# Altium PCB AP2-Core.PcbDoc (part 3 of 3)
Units mm, origin at the board's own origin, x right, y up, seen from the top; angles counter-clockwise.
Board outline 50.2 x 44.2 mm, 4 copper layers (顶层, MidLayer1, MidLayer2, 底层); 65 components, 157 nets, 448 pads, 134 vias.
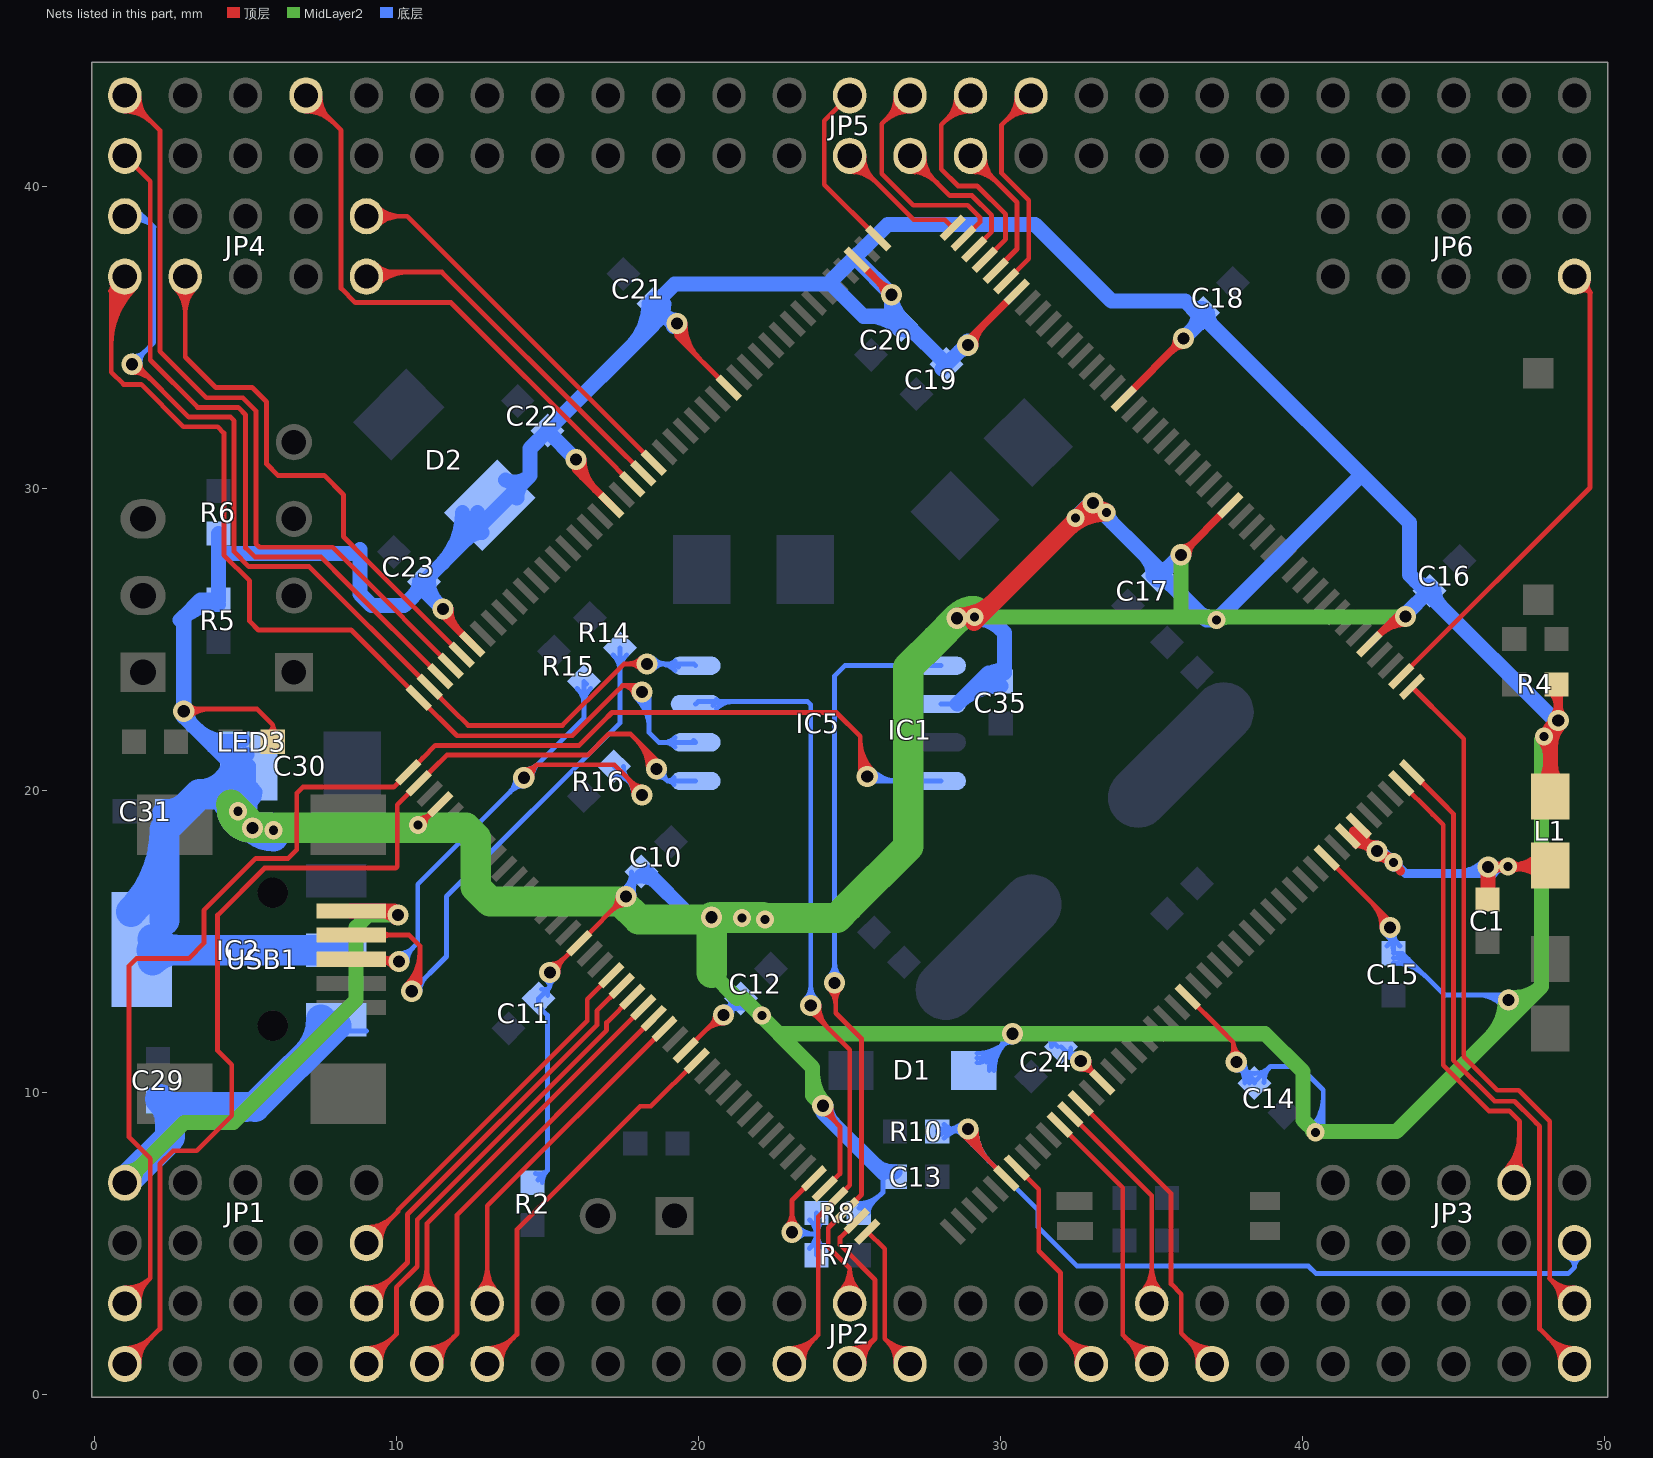
[diagram p5: the nets of this part, all layers, seen from the top]

## Via types
v1: diameter 0.7, hole 0.4, 顶层 to 底层, 90 vias
v2: diameter 0.6, hole 0.3, 顶层 to 底层, 44 vias

## Nets (pads, with @x,y where several pads share a name; then routed paths per layer and width w, separated by ;. In a path a pad name is that pad's centre, name@x,y a point inside that pad or via, vN(x,y) a via of type N, cw(c..) or ccw(c..) an arc to the next point about the centre after c; other vN are vias at no path point) (continued)
PG6: IC1.110 JP4.9 | length 15.9
  顶层 w0.16: JP4.9@9,39 10.354,39 IC1.110@18.515,30.839 ; JP4.9@9.219,38.781 cw(c9.748,38.252) 9.748,39 cw(c9.748,39.748) JP4.9@9.219,39.219 ; JP4.9@9.332,38.668 cw(c10.135,37.865) 10.135,39 cw(c10.135,40.135) JP4.9@9.332,39.332
PG7: IC1.111 JP4.10 | length 15.2
  顶层 w0.16: JP4.10@9,37 9.15,37.15 11.496,37.15 17.113,31.533 IC1.111@18.161,30.485 ; JP4.10@9.106,36.944 cw(c9.604,36.446) 9.604,37.15 ; JP4.10@9.219,36.831 cw(c9.99,36.06) 9.99,37.15 ; JP4.10@9.332,36.718 cw(c10.376,35.674) 10.376,37.15 ; JP4.10@9.332,37.382 ccw(c9.893,37.943) 9.893,37.15
PG8: IC1.112 JP5.7 | length 22.2
  顶层 w0.16: JP5.7@7,42.48 cw(c7,41.225) 7.888,42.112 ; JP5.7@7,42.64 cw(c7,41.771) 7.615,42.385 ; JP5.7@7,43 8.16,41.84 8.16,36.61 8.63,36.14 11.799,36.14 16.793,31.146 IC1.112@17.808,30.132 ; JP5.7@7.31,42.95 ccw(c7.938,42.95) 7.494,42.506 ; JP5.7@7.47,42.95 ccw(c8.484,42.95) 7.767,42.233
PG9: IC1.152 JP1.10 | length 15.2
  顶层 w0.16: JP1.10@9,5 10.04,6.04 10.04,6.09 16.31,12.36 16.31,13.077 IC1.152@17.101,13.868 ; JP1.10@9,5.36 ccw(c9,6.229) 9.615,5.615 ; JP1.10@9,5.52 ccw(c9,6.775) 9.888,5.888 ; JP1.10@9.31,5.05 cw(c9.938,5.05) 9.494,5.494 ; JP1.10@9.47,5.05 cw(c10.484,5.05) 9.767,5.767
PG10: IC1.153 JP2.9 | length 17
  顶层 w0.16: JP2.9@9,3 10.36,4.36 10.36,5.95 16.63,12.22 16.63,12.69 IC1.153@17.454,13.515 ; JP2.9@9,3.36 ccw(c9,4.229) 9.615,3.615 ; JP2.9@9,3.52 ccw(c9,4.775) 9.888,3.888 ; JP2.9@9.31,3.05 cw(c9.938,3.05) 9.494,3.494 ; JP2.9@9.47,3.05 cw(c10.484,3.05) 9.767,3.767
PG11: IC1.154 JP2.10 | length 18.8
  顶层 w0.16: JP2.10@9,1 9.99,1.99 9.99,3.537 10.68,4.227 10.68,5.78 16.95,12.05 16.95,12.303 IC1.154@17.808,13.161 ; JP2.10@9,1.36 ccw(c9,2.229) 9.615,1.615 ; JP2.10@9,1.52 ccw(c9,2.775) 9.888,1.888 ; JP2.10@9.31,1.05 cw(c9.938,1.05) 9.494,1.494 ; JP2.10@9.47,1.05 cw(c10.484,1.05) 9.767,1.767
PG12: IC1.155 JP2.11 | length 15.7
  顶层 w0.16: JP2.11@10.668,3.382 ccw(c9.865,4.185) 11,4.185 ccw(c12.135,4.185) JP2.11@11.332,3.382 ; JP2.11@10.781,3.269 ccw(c10.252,3.798) 11,3.798 ccw(c11.748,3.798) JP2.11@11.219,3.269 ; JP2.11@11,3 11,5.646 IC1.155@18.161,12.808
PG13: IC1.156 JP2.12 | length 17.5
  顶层 w0.16: JP2.12@11,1 12,2 12,5.939 IC1.156@18.515,12.454 ; JP2.12@11,1.36 ccw(c11,2.229) 11.615,1.615 ; JP2.12@11,1.52 ccw(c11,2.775) 11.888,1.888 ; JP2.12@11.31,1.05 cw(c11.938,1.05) 11.494,1.494 ; JP2.12@11.47,1.05 cw(c12.484,1.05) 11.767,1.767
PG14: IC1.157 JP2.13 | length 14.5
  顶层 w0.16: JP2.13@12.668,3.382 ccw(c11.865,4.185) 13,4.185 ccw(c14.135,4.185) JP2.13@13.332,3.382 ; JP2.13@12.781,3.269 ccw(c12.252,3.798) 13,3.798 ccw(c13.748,3.798) JP2.13@13.219,3.269 ; JP2.13@13,3 13,6.232 IC1.157@18.868,12.1
PG15: IC1.160 JP2.14 | length 16.1
  顶层 w0.16: JP2.14@13,1 13.98,1.98 13.98,5.45 18.06,9.53 18.419,9.53 IC1.160@19.929,11.04 ; JP2.14@13,1.36 ccw(c13,2.229) 13.615,1.615 ; JP2.14@13,1.52 ccw(c13,2.775) 13.888,1.888 ; JP2.14@13.31,1.05 cw(c13.938,1.05) 13.494,1.494 ; JP2.14@13.47,1.05 cw(c14.484,1.05) 13.767,1.767
PH2: IC1.43 JP3.7 | length 18.9
  顶层 w0.16: IC1.43@43.263,20.232 44.3,19.196 44.65,18.846 44.65,11.61 44.65,10.89 46.16,9.38 46.83,9.38 47.18,9.03 47.18,7.18 JP3.7@47,7 ; JP3.7@46.668,7.382 ccw(c45.431,8.619) 47.18,8.619 ; JP3.7@46.781,7.269 ccw(c45.817,8.233) 47.18,8.233 ; JP3.7@46.894,7.156 ccw(c46.203,7.847) 47.18,7.847 ; 47.18,7.75 ccw(c47.7,7.75) JP3.7@47.332,7.382
PH3: IC1.44 JP2.50 | length 25.3
  顶层 w0.16: IC1.44@43.617,20.586 44.63,19.573 44.99,19.213 44.99,11.06 46.35,9.7 47.01,9.7 47.63,9.08 ; 47.75,8.96 47.63,9.08 ; 48.112,1.888 ccw(c49,2.775) JP2.50@49,1.52 ; 48.233,1.767 cw(c47.516,1.05) JP2.50@48.53,1.05 ; 48.385,1.615 ccw(c49,2.229) JP2.50@49,1.36 ; 48.506,1.494 cw(c48.062,1.05) JP2.50@48.69,1.05 ; JP2.50@49,1 47.84,2.16 47.84,8.87 47.63,9.08
PH4: IC1.45 JP2.49 | length 25.8
  顶层 w0.16: IC1.45@43.617,23.414 44.96,22.071 45.33,21.701 45.33,11.173 46.443,10.06 47.15,10.06 48.18,9.03 48.18,3.86 48.16,3.84 JP2.49@49,3 ; 48.185,3.815 ccw(c48.905,4.534) JP2.49@48.97,3.519 ; 48.233,3.767 cw(c47.516,3.05) JP2.49@48.53,3.05 ; 48.435,3.565 ccw(c48.935,4.064) JP2.49@48.98,3.359 ; 48.506,3.494 cw(c48.062,3.05) JP2.49@48.69,3.05
PH5: IC1.46 JP6.10 | length 16.8
  顶层 w0.16: IC1.46@43.263,23.768 49.51,30.014 49.51,36.49 JP6.10@49,37 ; JP6.10@49.199,36.524 cw(c49.325,36.255) 49.535,36.465 cw(c49.779,36.709) JP6.10@49.449,36.811
PH6: IC1.83 JP5.31 | length 10.2
  顶层 w0.16: 30.112,42.112 cw(c31,41.225) JP5.31@31,42.48 ; IC1.83@30.182,36.849 30.93,37.597 30.93,39.523 30.03,40.423 30.03,42.03 JP5.31@31,43 ; 30.233,42.233 ccw(c29.516,42.95) JP5.31@30.53,42.95 ; 30.385,42.385 cw(c31,41.771) JP5.31@31,42.64 ; 30.506,42.506 ccw(c30.062,42.95) JP5.31@30.69,42.95
PH7: IC1.84 JP5.30 | length 7.7
  顶层 w0.16: JP5.30@29,40.48 cw(c29,39.225) 29.888,40.112 ; JP5.30@29,40.64 cw(c29,39.771) 29.615,40.385 ; JP5.30@29,41 30.54,39.46 30.54,37.914 IC1.84@29.828,37.203 ; JP5.30@29.31,40.95 ccw(c29.938,40.95) 29.494,40.506 ; JP5.30@29.47,40.95 ccw(c30.484,40.95) 29.767,40.233
PH8: IC1.85 JP5.29 | length 10.3
  顶层 w0.16: 28.112,42.112 cw(c29,41.225) JP5.29@29,42.48 ; 28.233,42.233 ccw(c27.516,42.95) JP5.29@28.53,42.95 ; 28.385,42.385 cw(c29,41.771) JP5.29@29,42.64 ; 28.506,42.506 ccw(c28.062,42.95) JP5.29@28.69,42.95 ; JP5.29@29,43 28.03,42.03 28.03,40.56 28.589,40.001 29.219,40.001 30.16,39.06 30.16,38.241 IC1.85@29.475,37.556
PH9: IC1.86 JP5.28 | length 7.8
  顶层 w0.16: JP5.28@27,40.48 cw(c27,39.225) 27.888,40.112 ; JP5.28@27,40.64 cw(c27,39.771) 27.615,40.385 ; JP5.28@27,41 28.319,39.681 29.049,39.681 29.7,39.03 29.7,38.489 IC1.86@29.121,37.91 ; JP5.28@27.31,40.95 ccw(c27.938,40.95) 27.494,40.506 ; JP5.28@27.47,40.95 ccw(c28.484,40.95) 27.767,40.233
PH10: IC1.87 JP5.27 | length 10.7
  顶层 w0.16: 26.112,42.112 cw(c27,41.225) JP5.27@27,42.48 ; 26.233,42.233 ccw(c25.516,42.95) JP5.27@26.53,42.95 ; 26.385,42.385 cw(c27,41.771) JP5.27@27,42.64 ; 26.506,42.506 ccw(c26.062,42.95) JP5.27@26.69,42.95 ; JP5.27@27,43 26.06,42.06 26.06,40.41 27.109,39.361 28.909,39.361 29.31,38.96 29.31,38.806 IC1.87@28.768,38.263
PH11: IC1.88 JP5.26 | length 7.4
  顶层 w0.16: JP5.26@25,40.48 cw(c25,39.225) 25.888,40.112 ; JP5.26@25,40.64 cw(c25,39.771) 25.615,40.385 ; JP5.26@25,41 27.114,38.886 28.145,38.886 IC1.88@28.414,38.617 ; JP5.26@25.31,40.95 ccw(c25.938,40.95) 25.494,40.506 ; JP5.26@25.47,40.95 ccw(c26.484,40.95) 25.767,40.233
PH12: IC1.89 JP5.25 | length 5.8
  顶层 w0.16: JP5.25@25,43 24.16,42.16 24.16,40.043 IC1.89@25.939,38.263
PH13: IC1.128 JP4.4 | length 20.9
  顶层 w0.16: JP4.4@2.668,36.618 cw(c1.865,35.815) 3,35.815 cw(c4.135,35.815) JP4.4@3.332,36.618 ; JP4.4@2.781,36.731 cw(c2.252,36.202) 3,36.202 cw(c3.748,36.202) JP4.4@3.219,36.731 ; JP4.4@3,37 3,34.63 3,34.34 4.01,33.33 5.22,33.33 5.69,32.86 5.69,30.8 6.07,30.42 7.6,30.42 8.24,29.78 8.24,28.386 8.98,27.646 IC1.128@12.151,24.475
PH14: IC1.129 JP5.1 | length 28.6
  顶层 w0.16: JP5.1@1,42.48 cw(c1,41.225) 1.888,42.112 ; JP5.1@1,42.64 cw(c1,41.771) 1.615,42.385 ; JP5.1@1,43 2.16,41.84 2.16,35.01 ; JP5.1@1.31,42.95 ccw(c1.938,42.95) 1.494,42.506 ; JP5.1@1.47,42.95 ccw(c2.484,42.95) 1.767,42.233 ; 2.16,35.16 2.16,34.53 3.7,32.99 4.91,32.99 5.34,32.56 5.34,28.16 5.46,28.04 6.07,28.04 7.879,28.04 8.66,27.259 IC1.129@11.797,24.121
PH15: IC1.130 JP5.2 | length 23.8
  顶层 w0.16: JP5.2@1,41 1.84,40.16 1.84,34.877 ; 1.84,35.08 1.84,34.24 3.41,32.67 4.75,32.67 5,32.42 5,28.02 5.3,27.72 7.491,27.72 8.34,26.871 IC1.130@11.444,23.768
PI0: IC1.131 IC5.4 JP4.1 | length 41.5
  顶层 w0.16: v1@1.24,33.83 cw(c1.24,32.864) 1.923,33.547 ; v1@1.24,33.99 cw(c1.24,33.411) 1.65,33.82 ; v1(1.24,34.1) 1.37,34.1 3.12,32.35 4.5,32.35 4.62,32.23 4.62,27.89 5.11,27.4 7.104,27.4 IC1.131@11.09,23.414 11.854,22.65 12.364,22.14 15.49,22.14 17.1,23.75 17.53,24.18 v1(18.29,24.18) ; v1@1.51,34.1 ccw(c1.848,34.1) 1.609,33.861 ; v1@18.099,23.989 ccw(c17.638,23.528) 17.638,24.18 ccw(c17.638,24.832) v1@18.099,24.371
  底层 w0.16: JP4.1@0.93,39.105 cw(c1.189,38.53) 1.634,38.976 ; JP4.1@0.996,38.959 cw(c1.29,38.304) 1.798,38.812 ; JP4.1@1,39 1.61,39 ; JP4.1@1.062,38.813 cw(c1.392,38.078) 1.962,38.648 ; v1(1.24,34.1) 1.64,34.5 ; v1@1.268,34.369 ccw(c1.316,34.824) 1.64,34.5 ; JP4.1@1.454,38.88 cw(c1.61,38.839) 1.61,39 ; JP4.1@1.454,39.12 ccw(c1.61,39.161) 1.61,39 ; v1@1.509,34.128 cw(c1.964,34.176) 1.64,34.5 ; v1(18.29,24.18) 19.84,24.18 IC5.4@19.9,24.12 ; v1@18.481,23.989 cw(c18.942,23.528) 18.942,24.18 cw(c18.942,24.832) v1@18.481,24.371 ; 18.692,24.18 cw(c18.692,23.432) IC5.4@19.22,23.961 ; 18.981,24.18 ccw(c18.981,24.518) IC5.4@19.22,24.279 ; 19.078,24.18 cw(c19.078,23.819) IC5.4@19.333,24.074 ; 1.61,39 1.96,38.65 1.96,34.82 1.64,34.5
PI1: IC1.132 IC5.2 JP4.2 | length 45.3
  顶层 w0.16: 0.55,34.729 cw(c3.221,34.729) JP4.2@1.332,36.618 ; 0.55,35.115 cw(c2.835,35.115) JP4.2@1.219,36.731 ; 0.55,35.501 cw(c2.449,35.501) JP4.2@1.106,36.844 ; 0.55,35.888 cw(c2.062,35.888) JP4.2@0.993,36.957 ; 0.55,36.274 cw(c1.676,36.274) JP4.2@0.88,37.07 ; JP4.2@0.57,36.761 cw(c0.374,36.676) 0.525,36.525 cw(c0.655,36.395) JP4.2@0.752,36.551 ; JP4.2@1,37 0.55,36.55 0.55,33.84 0.96,33.43 1.54,33.43 2.94,32.03 4.07,32.03 4.28,31.82 4.28,27.777 5.13,26.927 5.13,25.59 5.42,25.3 5.95,25.3 8.497,25.3 IC1.132@10.737,23.061 11.997,21.8 15.82,21.8 17.22,23.2 17.48,23.46 ; 17.693,23.46 cw(c17.693,23.126) v1@18.014,23.219 ; v1@17.861,23.174 ccw(c17.48,23.063) 17.48,23.46 ; v1(18.12,23.25) 17.91,23.46 17.48,23.46
  底层 w0.16: v1@17.929,23.059 cw(c16.889,22.019) 18.36,22.019 ; v1@18.042,23.172 cw(c17.275,22.405) 18.36,22.405 ; v1@18.155,23.285 cw(c17.661,22.791) 18.36,22.791 ; v1@18.33,23.25 18.36,23.22 18.36,21.9 18.68,21.58 IC5.2@19.9,21.58 IC5.2@19.83,21.65 ; IC5.2@19.22,21.421 ccw(c18.837,21.037) 18.837,21.58 ccw(c18.837,22.123) IC5.2@19.22,21.739
PI2: IC1.133 IC5.8 JP2.1 | length 53.2
  顶层 w0.16: JP2.1@1,3 1.84,3.84 ; JP2.1@1.013,3.36 ccw(c1.044,4.12) 1.582,3.582 ; JP2.1@1.019,3.52 ccw(c1.064,4.616) 1.84,3.84 ; JP2.1@1.31,3.05 cw(c1.938,3.05) 1.494,3.494 ; JP2.1@1.47,3.05 cw(c2.484,3.05) 1.767,3.767 ; 25.35,20.885 ccw(c26.015,20.885) v1@25.545,20.415 ; 25.35,21.271 ccw(c26.401,21.271) v1@25.658,20.528 ; 25.35,21.657 ccw(c26.787,21.657) v1@25.771,20.641 ; v1(25.58,20.45) 25.35,20.68 25.35,21.78 24.56,22.57 17.13,22.57 16.83,22.27 16.04,21.48 11.277,21.48 10.857,21.06 IC1.133@10.383,20.586 9.897,20.1 7.06,20.1 6.89,20.1 6.69,19.9 6.69,18.02 6.41,17.74 5.34,17.74 3.62,16.02 3.62,14.93 3.11,14.42 1.38,14.42 1.14,14.18 1.14,8.51 1.84,7.81 1.84,3.84
  底层 w0.16: v1(25.58,20.45) 25.73,20.3 IC5.8@28.023,20.3 ; v1@25.658,20.528 ccw(c26.208,21.078) 26.208,20.3 ; v1@25.771,20.641 ccw(c26.594,21.464) 26.594,20.3 ; IC5.8@27.344,20.141 ccw(c26.96,19.757) 26.96,20.3 ccw(c26.96,20.843) IC5.8@27.344,20.459
PI3: IC1.134 IC5.1 JP2.2 | length 43.9
  顶层 w0.16: JP2.2@1,1 2.16,2.16 2.16,7.62 2.6,8.06 3.377,8.06 4.54,9.223 4.54,10.9 4.07,11.37 4.07,15.86 5.63,17.42 9.97,17.42 10.02,17.47 10.02,19.516 10.18,19.676 IC1.134@10.737,20.232 11.204,20.7 11.664,21.16 16.28,21.16 16.32,21.16 17.02,21.86 17.74,21.86 18.6,21 v1(18.6,20.7) ; JP2.2@1,1.36 ccw(c1,2.229) 1.615,1.615 ; JP2.2@1,1.52 ccw(c1,2.775) 1.888,1.888 ; JP2.2@1.31,1.05 cw(c1.938,1.05) 1.494,1.494 ; JP2.2@1.47,1.05 cw(c2.484,1.05) 1.767,1.767 ; 17.927,21.673 cw(c16.954,20.7) v1@18.33,20.7 ; 18.2,21.4 cw(c17.5,20.7) v1@18.49,20.7 ; 18.473,21.127 cw(c18.046,20.7) v1@18.65,20.7
  底层 w0.16: v1(18.6,20.7) 18.6,20.67 18.97,20.3 ; v1@18.628,20.431 cw(c18.669,20.029) 18.955,20.315 cw(c19.199,20.559) v1@18.863,20.638 ; IC5.1@19.19,20.179 ccw(c18.97,20.04) 18.97,20.3 ; IC5.1@19.19,20.421 cw(c18.97,20.56) 18.97,20.3 ; IC5.1@19.9,20.3 18.97,20.3
PI4: IC1.173 IC5.3 JP2.24 | length 33.8
  顶层 w0.16: JP2.24@23,1 23.96,1.96 23.96,5.879 IC1.173@24.525,6.444 25,6.919 25,11.4 23.71,12.69 v1(23.71,12.87) ; JP2.24@23,1.36 ccw(c23,2.229) 23.615,1.615 ; JP2.24@23,1.52 ccw(c23,2.775) 23.888,1.888 ; JP2.24@23.31,1.05 cw(c23.938,1.05) 23.494,1.494 ; JP2.24@23.47,1.05 cw(c24.484,1.05) 23.767,1.767 ; v1@23.71,12.6 cw(c23.71,12.383) 23.864,12.536 ; v1@23.82,12.87 ccw(c24.52,12.87) 24.025,12.375 ; v1@23.98,12.87 ccw(c25.066,12.87) 24.298,12.102
  底层 w0.16: IC5.3@19.9,22.85 19.98,22.93 23.61,22.93 23.71,22.83 23.71,16.33 v1(23.71,12.87) ; IC5.3@20.467,22.804 cw(c20.77,22.5) 20.77,22.93 cw(c20.77,23.2) IC5.3@20.58,23.009 ; IC5.3@20.58,22.691 cw(c21.157,22.114) 21.157,22.93 ; v1@23.519,13.061 ccw(c23.058,13.522) 23.71,13.522 ccw(c24.362,13.522) v1@23.901,13.061
PI5: IC1.174 IC5.5 JP2.25 | length 31.7
  顶层 w0.16: v1@24.309,13.429 cw(c23.752,12.872) 24.54,12.872 ; v1@24.422,13.542 cw(c24.138,13.258) 24.54,13.258 ; v1(24.5,13.62) 24.54,13.58 24.54,12.62 25.39,11.77 25.39,6.601 IC1.174@24.879,6.09 24.29,5.501 24.29,4.877 25,4.167 ; 24.54,13.065 cw(c25.055,13.065) v1@24.691,13.429 ; JP2.25@24.671,3.386 ccw(c23.907,4.167) 25,4.167 ; JP2.25@24.783,3.272 ccw(c24.279,3.787) 25,3.787 ccw(c25.721,3.787) JP2.25@25.217,3.272 ; JP2.25@25,3 25,4.167 ; JP2.25@25.329,3.386 cw(c26.093,4.167) 25,4.167
  底层 w0.16: v1@24.309,13.811 ccw(c23.848,14.272) 24.5,14.272 ccw(c25.152,14.272) v1@24.691,13.811 ; v1(24.5,13.62) 24.5,16.42 24.5,23.78 24.84,24.12 IC5.5@28.023,24.12 ; IC5.5@27.344,23.961 ccw(c26.96,23.577) 26.96,24.12 ccw(c26.96,24.663) IC5.5@27.344,24.279
PI6: IC1.175 JP2.26 | length 8.6
  顶层 w0.16: JP2.26@25,1 25.84,1.84 ; JP2.26@25.013,1.36 ccw(c25.044,2.12) 25.582,1.582 ; JP2.26@25.019,1.52 ccw(c25.064,2.616) 25.84,1.84 ; IC1.175@25.232,5.737 24.68,5.184 24.68,4.94 25.84,3.78 25.84,1.84 ; JP2.26@25.31,1.05 cw(c25.938,1.05) 25.494,1.494 ; JP2.26@25.47,1.05 cw(c26.484,1.05) 25.767,1.767
PI7: IC1.176 JP2.28 | length 7.7
  顶层 w0.16: IC1.176@25.586,5.383 26.16,4.809 26.16,1.84 JP2.28@27,1 ; 26.185,1.815 ccw(c26.905,2.534) JP2.28@26.97,1.519 ; 26.233,1.767 cw(c25.516,1.05) JP2.28@26.53,1.05 ; 26.435,1.565 ccw(c26.935,2.064) JP2.28@26.98,1.359 ; 26.506,1.494 cw(c26.062,1.05) JP2.28@26.69,1.05
PI8: IC1.7 JP2.34 | length 10.5
  顶层 w0.16: IC1.7@30.536,7.504 31.26,6.78 31.26,4.74 31.98,4.02 31.98,2.02 JP2.34@33,1 ; 32.112,1.888 ccw(c33,2.775) JP2.34@33,1.52 ; 32.233,1.767 cw(c31.516,1.05) JP2.34@32.53,1.05 ; 32.385,1.615 ccw(c33,2.229) JP2.34@33,1.36 ; 32.506,1.494 cw(c32.062,1.05) JP2.34@32.69,1.05
PI9: IC1.11 JP2.36 | length 12.1
  顶层 w0.16: IC1.11@31.95,8.919 34.04,6.828 34.04,1.96 JP2.36@35,1 ; 34.112,1.888 ccw(c35,2.775) JP2.36@35,1.52 ; 34.233,1.767 cw(c33.516,1.05) JP2.36@34.53,1.05 ; 34.385,1.615 ccw(c35,2.229) JP2.36@35,1.36 ; 34.506,1.494 cw(c34.062,1.05) JP2.36@34.69,1.05
PI10: IC1.12 JP2.35 | length 10.3
  顶层 w0.16: IC1.12@32.303,9.272 35,6.575 JP2.35@35,3 ; JP2.35@34.668,3.382 ccw(c33.865,4.185) 35,4.185 ccw(c36.135,4.185) JP2.35@35.332,3.382 ; JP2.35@34.781,3.269 ccw(c34.252,3.798) 35,3.798 ccw(c35.748,3.798) JP2.35@35.219,3.269
PI11: IC1.13 JP2.38 | length 13.4
  顶层 w0.16: IC1.13@32.657,9.626 35.64,6.642 35.64,3.65 35.98,3.31 35.98,2.02 JP2.38@37,1 ; 36.112,1.888 ccw(c37,2.775) JP2.38@37,1.52 ; 36.233,1.767 cw(c35.516,1.05) JP2.38@36.53,1.05 ; 36.385,1.615 ccw(c37,2.229) JP2.38@37,1.36 ; 36.506,1.494 cw(c36.062,1.05) JP2.38@36.69,1.05
RFU: IC1.171 R7.2 R8.2 | length 9.1
  顶层 w0.16: v1@22.899,5.551 ccw(c22.438,6.012) 23.09,6.012 ccw(c23.742,6.012) v1@23.281,5.551 ; v1(23.09,5.36) 23.09,6.423 IC1.171@23.818,7.151
  底层 w0.16: v1(23.09,5.36) 23.15,5.3 23.85,5.3 ; v1@23.17,5.435 ccw(c23.481,5.726) 23.481,5.3 ; v1@23.281,5.169 cw(c23.597,4.853) 23.597,5.3 ; v1@23.287,5.544 ccw(c23.85,6.07) 23.85,5.3 ; R7.2@23.674,4.826 ccw(c23.127,5.373) 23.9,5.373 ccw(c24.673,5.373) R7.2@24.126,4.826 ; R8.2@23.674,5.774 cw(c23.127,5.227) 23.9,5.227 cw(c24.672,5.227) R8.2@24.126,5.774 ; R7.2@23.9,4.6 R8.2@23.9,6
USB_D+: R15.1 R16.2 USB1.3 | length 30.6
  顶层 w0.16: USB1.3@8.5,14.4 10,14.4 v1(10.08,14.32) ; USB1.3@9.235,14.4 cw(c9.235,13.475) v1@9.889,14.129 ; USB1.3@9.24,14.38 USB1.3@9.39,14.23 ; USB1.3@9.52,14.28 cw(c9.81,13.99) 9.81,14.4 cw(c9.81,14.81) USB1.3@9.52,14.52 ; v1@9.889,14.511 cw(c9.621,14.779) 9.621,14.4 cw(c9.621,13.861) v1@10.002,14.242 ; v1(14.21,20.41) 14.64,20.84 ; v1@14.224,20.68 ccw(c14.251,21.229) 14.64,20.84 ; v1@14.48,20.424 cw(c15.029,20.451) 14.64,20.84 ; 17.595,20.455 cw(c16.981,19.84) v1@17.85,19.84 ; 17.813,20.237 ccw(c18.12,20.545) v1@18.12,20.11 ; 17.869,20.181 cw(c17.527,19.84) v1@18.01,19.84 ; v1(18.12,19.84) 18.12,19.93 17.21,20.84 15,20.84 14.64,20.84
  底层 w0.16: v1(10.08,14.32) 10.7,14.94 10.7,16.88 16.2,22.38 16.2,22.79 R15.1@16.2,23.6 R15.1@16.29,23.51 ; v1@10.08,14.59 ccw(c10.08,15.242) 10.541,14.781 ccw(c11.002,14.32) v1@10.35,14.32 ; 13.735,19.915 ccw(c13.24,20.41) v1@13.94,20.41 ; 13.783,19.963 cw(c14.21,19.536) v1@14.21,20.14 ; v1@14.21,20.68 ccw(c14.21,21.38) 14.705,20.885 ; v1@14.48,20.41 cw(c15.084,20.41) 14.657,20.837 ; R15.1@15.974,23.374 cw(c15.427,22.827) 16.2,22.827 cw(c16.973,22.827) R15.1@16.426,23.374 ; R16.2@17.19,20.47 cw(c17.19,19.697) 17.736,20.244 cw(c18.283,20.79) R16.2@17.51,20.79 ; R16.2@17.19,20.79 18.12,19.86 v1(18.12,19.84) ; 17.645,20.335 cw(c17.15,19.84) v1@17.85,19.84 ; 17.693,20.287 ccw(c18.12,20.714) v1@18.12,20.11
USB_D-: R14.2 USB1.2 | length 24.4
  顶层 w0.16: USB1.2@8.5,15.2 10.41,15.2 10.77,14.84 10.77,13.61 ; USB1.2@9.52,15.08 cw(c9.81,14.79) 9.81,15.2 cw(c9.81,15.61) USB1.2@9.52,15.32 ; v1@10.309,13.531 ccw(c9.196,14.644) 10.77,14.644 ; v1@10.422,13.418 ccw(c9.583,14.257) 10.77,14.257 ; v1(10.5,13.34) 10.77,13.61 ; v1@10.535,13.305 ccw(c9.969,13.871) 10.77,13.871 ; v1@10.616,13.584 ccw(c10.675,13.705) 10.77,13.61 ; v1@10.744,13.456 cw(c10.865,13.515) 10.77,13.61
  底层 w0.16: v1@10.5,13.61 ccw(c10.5,14.262) 10.961,13.801 ccw(c11.422,13.34) v1@10.77,13.34 ; v1@10.61,13.45 v1(10.5,13.34) 11.65,14.49 11.65,16.48 17.39,22.22 17.39,22.29 R14.2@17.39,24.71 ; R14.2@17.164,24.484 cw(c16.617,23.938) 17.39,23.938 cw(c18.162,23.938) R14.2@17.616,24.484
VBAT: IC1.6 JP3.10 R10.1 | length 36.3
  顶层 w0.16: v1@28.863,8.78 ccw(c29.611,8.78) 29.082,8.251 ; v1(28.913,8.78) 28.733,8.6 IC1.6@30.182,7.151 ; v1@29.023,8.78 ccw(c30.157,8.78) 29.355,7.978 ; v1@29.183,8.78 ccw(c30.704,8.78) 29.628,7.705
  底层 w0.16: R10.1@27.9,8.7 27.98,8.78 v1(28.913,8.78) 28.913,8.417 ; R10.1@28.013,8.587 cw(c28.479,8.121) 28.479,8.78 cw(c28.479,9.279) R10.1@28.126,8.926 ; R10.1@28.126,8.474 cw(c28.866,7.734) v1@28.866,8.78 ; v1@28.722,8.589 ccw(c28.261,8.128) 28.261,8.78 ccw(c28.261,9.432) v1@28.722,8.971 ; v1@28.863,8.78 ccw(c29.618,8.78) 29.084,8.246 ; v1@29.023,8.78 ccw(c30.164,8.78) 29.357,7.973 ; v1@29.183,8.78 ccw(c30.71,8.78) 29.63,7.7 ; JP3.10@48.795,4.527 cw(c48.637,4.2) 49,4.2 ; JP3.10@49,5 49,4.2 ; JP3.10@49.205,4.527 ccw(c49.363,4.2) 49,4.2 ; 28.913,8.417 ccw(c28.804,8.417) 28.835,8.521 cw(c28.804,8.417) 28.913,8.417 ; 28.913,8.417 cw(c29.021,8.417) 28.99,8.521 ccw(c29.021,8.417) 28.913,8.417 ; 28.913,8.417 31.23,6.1 31.23,5.54 32.53,4.24 40.19,4.24 40.44,3.99 48.79,3.99 49,4.2
VDD5: C29.2 IC2.3 JP1.1 USB1.1 | length 32.3
  顶层 w0.16: v1@9.91,16 v1(10.05,15.86)
  顶层 w0.5: USB1.1@8.5,16 v1@9.91,16 ; USB1.1@9.471,16 cw(c9.471,15.281) v1@9.979,15.789
  MidLayer2 w0.16: JP1.1@1,7 JP1.1@1,7.02 ; v1(10.05,15.86) v1@10.22,15.86
  MidLayer2 w0.5: JP1.1@1,7.02 2.98,9 4.6,9 8.66,13.06 8.66,15.46 9.06,15.86 v1(10.05,15.86) ; JP1.1@1,7.35 ccw(c1,8.147) 1.563,7.583 ; JP1.1@1.3,7.05 cw(c1.952,7.05) 1.491,7.511
  底层 w0.16: JP1.1@0.85,7.25 JP1.1@1.11,6.99 ; JP1.1@1,7 JP1.1@1,7.01 ; 2.5,9.5 2.51,9.51 ; 5.31,9.51 5.015,9.51 5.495,9.99 5.64,9.99 ; IC2.3@7.67,12.02 IC2.3@9,12.02 ; IC2.3@8,12.2 IC2.3@8,12.4
  底层 w1: JP1.1@1,7.01 2.5,8.51 2.5,9.5 ; C29.2@2.171,9.771 cw(c1.376,8.976) 2.5,8.976 ; 2.51,9.51 5.015,9.51 ; 5.31,9.51 IC2.3@8,12.2 ; 6.999,11.199 ccw(c5.799,12.4) IC2.3@7.497,12.4
VDD33: C10.1 C11.1 C12.1 C13.1 C14.1 C15.1 C16.1 C17.1 C18.1 C19.1 C20.1 C21.1 C22.1 C23.1 C24.1 C30.1 C31.2 C35.1 D1.1 D2.A IC1.15 IC1.23 IC1.36 IC1.49 IC1.62 IC1.72 IC1.82 IC1.91 IC1.103 IC1.114 IC1.127 IC1.136 IC1.149 IC1.159 IC1.172 IC2.2 IC2.4 IC5.6 L1.2 LED3.1 R2.2 R4.1 R5.1 R6.1 R8.1 | length 425
  顶层 w0.16: v1(2.95,22.61) 3.02,22.68 5.38,22.68 5.9,22.16 ; v1@3.028,22.532 cw(c3.385,22.175) 3.385,22.68 ; v1@3.141,22.419 cw(c3.771,21.789) 3.771,22.68 ; v1@3.141,22.801 ccw(c3.433,23.093) 3.433,22.68 ; LED3.1@5.738,21.876 ccw(c5.57,22.16) 5.9,22.16 ; LED3.1@5.9,21.6 5.9,22.16 ; LED3.1@6.062,21.876 cw(c6.23,22.16) 5.9,22.16 ; v2(10.71,18.84) 10.759,18.84 IC1.136@11.444,19.525 ; v2@10.71,19.06 ccw(c10.71,19.708) IC1.136@11.168,19.25 ; v2@10.93,18.84 cw(c11.344,18.84) 11.051,19.133 ; v1(15.071,13.96) IC1.149@16.04,14.929 v1(17.59,16.479) ; v1@15.071,14.23 ccw(c15.071,14.882) 15.532,14.421 ccw(c15.993,13.96) v1@15.341,13.96 ; v1@17.32,16.479 cw(c16.668,16.479) 17.129,16.018 cw(c17.59,15.557) v1@17.59,16.209 ; v1@19.23,35.45 ccw(c20.139,35.45) 19.496,34.807 ; v1(19.28,35.45) 19.28,35.023 ; v1@19.39,35.45 ccw(c20.686,35.45) 19.769,34.534 ; v1@19.55,35.45 ccw(c21.232,35.45) 20.043,34.261 ; IC1.159@19.575,11.393 v1@20.732,12.55 ; 20.209,12.027 cw(c20.82,11.416) v1@20.82,12.28 ; 20.421,12.239 ccw(c20.111,12.55) v1@20.55,12.55 ; 20.482,12.3 cw(c20.82,11.962) v1@20.82,12.44 ; IC1.103@20.99,33.314 19.28,35.023 ; v1@24.11,9.28 cw(c24.11,8.942) 24.349,9.181 ; v1@24.11,9.42 24.68,8.85 24.68,7.306 24.6,7.226 IC1.172@24.172,6.797 ; v1@24.22,9.544 ccw(c24.711,9.515) 24.363,9.167 ; v1@24.38,9.534 ccw(c25.187,9.487) 24.615,8.915 ; v1(26.38,36.4) v1@26.38,36.409 ; v1@28.653,25.73 ccw(c28.886,25.821) v2@28.886,25.57 ; v1@28.69,25.57 ccw(c28.69,26.06) v2@29.082,25.766 ; v1@28.741,25.499 cw(c28.912,25.328) v2@28.912,25.57 ; v1@28.802,25.788 ccw(c29.12,25.912) 29.12,25.57 28.37,25.57 ccw(c28.37,26.3) v2@28.954,25.862 ; v1@32.65,10.76 cw(c32.65,10.068) IC1.15@33.139,10.557 ; v1(32.65,11.03) 32.667,11.03 IC1.15@33.364,10.333 ; v1@32.92,11.03 ccw(c33.532,11.03) IC1.15@33.099,10.598 ; v1(33.05,29.5) v1@33.19,29.5 ; IC1.23@36.192,13.161 37.28,12.074 37.7,11.654 ; v1@37.609,11.191 ccw(c37.39,11.41) 37.7,11.41 ; 37.7,11.371 ccw(c38.023,11.371) v1@37.857,11.094 ; v1(37.8,11) 37.7,11.1 37.7,11.654 ; v1@37.939,11.232 cw(c38.192,11.654) 37.7,11.654 ; IC1.36@40.789,17.757 42.89,15.656 v1(42.89,15.45) v1@42.89,15.53 ; 42.283,16.262 cw(c41.471,15.45) v1@42.62,15.45 ; 42.557,15.989 cw(c42.017,15.45) v1@42.78,15.45 ; v1@43.124,25.75 v1(43.4,25.75) ; v2@47.99,22 ccw(c47.99,22.41) v1@48.28,22.12 ; v2@48.04,21.994 ccw(c48.079,22.161) 48.2,22.04 ; v2@48.18,21.89 cw(c48.288,21.952) 48.2,22.04 ; v2@48.21,21.78 cw(c48.862,21.78) v1@48.401,22.241 ; v1@48.221,22.175 cw(c48.118,22.122) 48.2,22.04 ; v1@48.335,22.061 ccw(c48.282,21.958) 48.2,22.04 ; v1(48.46,22.3) 48.2,22.04 ; 19.28,35.023 ccw(c19.078,35.023) 19.164,35.206 cw(c19.078,35.023) 19.28,35.023 ; 19.28,35.023 cw(c19.482,35.023) 19.396,35.206 ccw(c19.482,35.023) 19.28,35.023
  顶层 w0.25: v1(11.53,26) 11.53,25.803 IC1.127@12.504,24.828 ; v1@11.755,26 ccw(c12.774,26) 12.054,25.279 ; v1@15.915,30.94 ccw(c16.711,30.94) 16.148,30.377 ; v1(15.94,30.94) 15.94,30.585 ; v1@16.165,30.94 ccw(c17.565,30.94) 16.575,29.95 ; IC1.114@17.101,29.425 15.94,30.585 ; IC1.91@25.232,37.556 v1@26.38,36.409 ; 25.99,36.799 cw(c25.591,36.4) v1@26.155,36.4 ; 26.011,36.778 ccw(c26.38,37.147) v1@26.38,36.625 ; v1@28.91,34.87 IC1.82@30.536,36.496 ; v1@29.135,34.73 cw(c30.017,34.73) 29.393,35.353 ; IC1.72@34.071,32.96 v1@36.05,34.939 ; 35.658,34.547 ccw(c35.255,34.95) v1@35.825,34.95 ; 35.685,34.574 cw(c36.05,34.208) v1@36.05,34.725 ; v1(35.972,27.79) IC1.62@37.607,29.425 ; v1@35.972,28.015 ccw(c35.972,28.558) 36.356,28.174 ccw(c36.74,27.79) v1@36.197,27.79 ; IC1.49@42.203,24.828 v1@43.124,25.75 ; IC1.49@42.545,25.171 cw(c43.4,24.316) v1@43.4,25.525 ; 42.972,25.598 cw(c43.4,25.17) v1@43.4,25.775 ; 15.94,30.585 ccw(c15.773,30.585) 15.844,30.736 cw(c15.773,30.585) 15.94,30.585 ; 15.94,30.585 cw(c16.107,30.585) 16.036,30.736 ccw(c16.107,30.585) 15.94,30.585
  顶层 w0.3: R4.1@48.223,23.323 cw(c47.652,22.752) 48.46,22.752 ; v1@48.319,22.441 ccw(c47.977,22.783) 48.46,22.783 ccw(c48.943,22.783) v1@48.601,22.441 ; v1(48.46,22.3) R4.1@48.46,23.48 ; 48.46,23.041 cw(c48.859,23.041) R4.1@48.577,23.323
  顶层 w0.5: L1.2@47.928,20.185 ccw(c47.271,20.842) 48.2,20.842 ccw(c49.129,20.842) L1.2@48.472,20.185 ; v2@47.955,21.745 cw(c47.362,21.152) 48.2,21.152 ; L1.2@48.2,19.786 48.2,22.04 ; 48.2,21.431 cw(c49.329,21.431) v1@48.531,22.229 ; v2@48.2,21.932 cw(c48.468,21.932) v1@48.462,22.2
  顶层 w0.6: v1@28.55,25.74 ccw(c28.55,27.527) 29.813,26.263 ; v2@29.12,25.57 v1(33.05,29.5) ; 32.203,28.653 cw(c33.5,27.355) v2(33.5,29.19) ccw(c33.126,28.664) v2@32.67,29.12
  MidLayer2 w0.16: v1@4.99,18.91 4.99,19.05 ; v1@20.36,15.72 v1(20.43,15.79) v1@20.45,15.77 ; v1@20.732,12.55 v1(20.82,12.55) ; 21.27,13.1 21.4,13.1 ; 21.37,13.1 21.4,13.1 ; 21.49,13.1 21.4,13.1 ; v2@22.12,15.79 v2(22.2,15.71) ; v1@24.11,9.32 v1(24.11,9.55) ; v1@28.55,25.67 v1(28.55,25.69) ; v1@32.47,11.03 v1(32.65,11.03) ; 35.96,25.73 35.972,25.742 ; v1@43.38,25.73 v1(43.4,25.75) ; v1(46.81,13.05) 47.128,12.732 ; v1@46.889,12.792 cw(c46.959,12.563) 47.128,12.732 ; v1@47.068,12.971 ccw(c47.297,12.901) 47.128,12.732 ; 47.132,12.732 47.128,12.732 ; v1@48.46,22.22 v1(48.46,22.3) ; v1(24.11,9.55) 24.11,9.42 v1(24.11,9.55)
  MidLayer2 w0.5: 20.43,13.94 21.27,13.1 ; 21.49,13.1 23.77,10.82 23.77,9.89 v1(24.11,9.55) ; 22.656,11.934 27.286,11.934 v1(30.386,11.934) 38.754,11.934 40.01,10.678 40.01,9.08 v2(40.42,8.67) ; 23.77,10.612 ccw(c25.172,10.612) v1@24.181,9.621 ; v2(29.13,25.73) v1@43.38,25.73 ; 35.972,25.742 v1(35.972,27.79) ; 36.778,25.73 cw(c36.778,25.268) v2@37.105,25.595 ; v2@37.175,25.595 cw(c37.502,25.268) 37.502,25.73 ; v2@40.32,8.7 43.1,8.7 47.9,13.5 ; 46.187,11.787 ccw(c44.923,13.05) v1@46.71,13.05 ; v1@46.825,13.149 ccw(c47.017,14.383) 47.9,13.5 ; 47.9,21.442 cw(c48.328,21.442) v2@48.025,21.745 ; 48.233,21.993 ccw(c47.925,22.3) v1@48.36,22.3 ; v1@48.46,22.22 47.9,21.66 47.9,13.5
  MidLayer2 w1: 4.52,19.52 4.99,19.05 ; v2@4.56,19.239 ccw(c5.23,19.454) v1(5.23,18.75) 12.29,18.75 12.62,18.42 12.62,16.79 13.1,16.31 17.421,16.31 18.011,15.72 v1@20.36,15.72 ; v2@4.609,19.159 ccw(c5.595,20.145) 5.595,18.75 ; 20.43,13.94 v1(20.43,15.79) v2@22.12,15.79 ; v1@20.45,15.77 24.58,15.77 24.96,16.15 26.94,18.13 26.94,24.06 27.86,24.98 v1@28.55,25.67 ; v1@28.584,25.704 cw(c29.13,25.157) 29.13,25.93 ccw(c29.13,25.157) v1@28.584,25.704
  底层 w0.16: IC2.4@1.68,14.5 IC2.4@1.88,14.7 ; 4.44,19.54 C30.1@4.44,19.86 ; 8.54,27.83 8.79,27.58 ; 12.036,28.036 12.036,28.224 ; R2.2@14.597,7.305 ccw(c14.716,7.674) 14.99,7.4 ; R2.2@14.68,7.09 14.99,7.4 ; C11.1@14.798,13.405 ccw(c14.88,13.662) 15.071,13.471 ; R2.2@14.82,7 cw(c15.375,7) 14.983,7.393 ; v1@14.927,13.732 cw(c14.763,13.471) 15.071,13.471 ; C11.1@15.005,13.198 cw(c15.262,13.28) 15.071,13.471 ; v1(15.071,13.96) 15.071,13.471 ; v1@15.215,13.732 ccw(c15.379,13.471) 15.071,13.471 ; v1@17.541,16.47 cw(c17.982,16.548) 17.665,16.865 ; v1(17.59,16.479) v1@17.59,16.79 ; v1@17.698,16.498 cw(c18.352,16.613) C10.1@17.883,17.083 ; C10.1@17.78,17.284 cw(c17.128,17.252) v1@17.59,16.79 ; v1@17.856,16.526 cw(c18.721,16.679) C10.1@18.1,17.3 ; C10.1@18.084,16.98 ccw(c18.052,16.328) v1@17.59,16.79 ; C10.1@18.26,17.3 C10.1@18.1,17.3 ; v1@20.805,12.535 cw(c21.396,11.944) 21.399,12.78 cw(c21.4,12.007) 21.946,12.554 cw(c22.493,13.1) C12.1@21.72,13.1 ; v1(20.82,12.55) C12.1@21.37,13.1 ; v1@20.82,12.82 ccw(c20.82,13.472) 21.281,13.011 ccw(c21.742,12.55) v1@21.09,12.55 ; v1@20.875,12.605 ccw(c20.38,13.1) C12.1@21.08,13.1 ; 21.077,12.807 cw(c21.398,12.486) C12.1@21.4,12.94 ; C12.1@21.4,13.1 21.96,12.54 v2(22.09,12.54) ; C12.1@21.493,13.007 ccw(c22.09,13.605) v2@22.09,12.76 ; 21.766,12.734 ccw(c22.09,13.059) v2@22.09,12.6 ; 21.806,12.694 cw(c21.653,12.54) v2@21.87,12.54 ; R8.1@25.3,6.16 ccw(c25.3,6.836) 25.778,6.358 ; R8.1@25.3,6.32 ccw(c25.3,7.382) 26.051,6.631 ; R8.1@25.42,6 26.1,6.68 26.1,7.1 C13.1@26.1,7.33 ; R8.1@25.62,6 cw(c26.103,6) 25.761,6.341 ; IC5.6@28.023,22.85 IC5.6@28.56,22.85 ; v1(28.55,25.69) v1@28.59,25.73 ; D1.1@29.21,10.97 ccw(c29.21,11.646) D1.1@29.688,11.168 ; D1.1@29.21,11.13 ccw(c29.21,12.192) 29.961,11.441 ; D1.1@29.21,11.29 ccw(c29.21,12.739) v1@30.234,11.714 ; D1.1@29.52,11 30.386,11.866 v1(30.386,11.934) 31.456,11.934 C24.1@31.89,11.5 ; 29.59,23.88 C35.1@30.12,23.88 ; D1.1@29.62,10.72 cw(c30.537,10.72) 29.889,11.369 ; D1.1@29.78,10.72 cw(c31.084,10.72) 30.162,11.642 ; 29.877,11.357 ccw(c29.301,11.934) v1@30.116,11.934 ; 30.041,11.521 cw(c30.386,11.176) v1@30.386,11.664 ; 30.15,11.63 ccw(c29.847,11.934) v1@30.276,11.934 ; v1@30.577,11.743 cw(c31.038,11.282) 31.038,11.934 cw(c31.038,12.586) v1@30.577,12.125 ; 31.511,11.879 ccw(c31.76,12.128) C24.1@31.886,11.799 ; 31.532,11.858 cw(c31.173,11.5) C24.1@31.68,11.5 ; C24.1@32,11.5 v1@32.47,11.03 ; C24.1@32.036,11.182 cw(c32.095,10.655) v1@32.47,11.03 ; C24.1@32.09,11.41 ccw(c32.433,11.753) v1@32.572,11.289 ; C24.1@32.279,11.221 ccw(c32.52,11.462) v1@32.618,11.135 ; 32.316,11.184 cw(c32.163,11.03) v1@32.38,11.03 ; C24.1@32.318,11.464 ccw(c32.845,11.405) v1@32.47,11.03 ; v1@32.96,29.5 v1(33.05,29.5) ; C17.1@35.2,27.1 C17.1@35.2,27.35 ; v1@37.783,11.017 cw(c37.066,10.3) C14.1@38.08,10.3 ; v1@37.8,10.73 cw(c37.8,10.078) 38.261,10.539 cw(c38.722,11) v1@38.07,11 ; v1(37.8,11) 38.4,10.4 C14.1@38.4,10.3 38.4,10.32 38.93,10.85 ; v1@38.024,10.776 ccw(c38.4,11.151) 38.4,10.62 ccw(c38.4,11.344) 38.912,10.832 ; 38.056,10.744 cw(c37.612,10.3) C14.1@38.24,10.3 ; C14.1@38.72,10.313 cw(c39.439,10.341) 38.93,10.85 ; v2@40.264,8.826 ccw(c39.261,9.829) 40.68,9.829 ; v2@40.378,8.712 ccw(c39.647,9.443) 40.68,9.443 ; v2(40.42,8.67) 40.68,8.93 ; v2@40.484,8.881 ccw(c40.541,9.069) 40.68,8.93 ; v2@40.491,8.599 ccw(c40.034,9.056) 40.68,9.056 ; v2@40.631,8.734 cw(c40.819,8.791) 40.68,8.93 ; v1@42.728,15.234 cw(c42.324,14.692) C15.1@43,14.692 ; C15.1@42.781,14.833 ccw(c42.304,15.34) v1@43,15.34 ; v1@42.824,15.362 cw(c42.562,15.011) 43,15.011 ; v1(42.89,15.45) v1@43,15.34 ; C15.1@43,14.28 cw(c43,12.783) 44.058,13.842 ; C15.1@43,14.44 cw(c43,13.329) 43.785,14.115 ; C15.1@43,14.7 v1@43,15.34 ; 43,15.064 cw(c43.276,15.064) v1@43.081,15.259 ; C15.1@43.219,14.833 cw(c43.696,15.34) v1@43,15.34 ; 43.512,14.388 ccw(c43,13.876) C15.1@43,14.6 43.3,14.6 44.68,13.22 46.64,13.22 v1(46.81,13.05) ; 45.748,13.22 cw(c45.748,11.988) v1@46.619,12.859 ; 46.134,13.22 cw(c46.134,12.374) v1@46.732,12.972 ; v1@48.46,22.25 v1(48.46,22.3) ; 14.99,7.4 14.99,12.55 14.7,12.84 C11.1@14.7,13.1 15.071,13.471 ; v1@17.59,16.79 C10.1@18.1,17.3 ; 38.93,10.85 39.9,10.85 40.68,10.07 40.68,8.93
  底层 w0.4: v2(47.99,21.78) v1@48.46,22.25 ; v2@48.169,21.959 ccw(c47.827,22.3) v1@48.31,22.3
  底层 w0.5: 2.837,25.627 cw(c4.1,24.363) R5.1@4.1,26.15 ; v1@3.05,22.61 ccw(c3.726,22.61) 3.248,22.132 ; 3.205,25.995 cw(c3.748,25.452) R5.1@4.043,26.161 ; 3.305,22.075 ccw(c4.451,23.22) C30.1@4.904,21.665 ; 3.903,21.477 ccw(c4.72,22.295) C30.1@5.043,21.185 ; 4.1,27.83 6.86,27.83 8.54,27.83 ; R6.1@4.1,28.5 R5.1@4.1,26.3 4.09,26.29 3.5,26.29 2.95,25.74 2.95,22.43 4.87,20.51 4.89,20.51 C30.1@5.1,20.3 ; v2@4.715,19.335 ccw(c3.784,20.266) C30.1@5.1,20.266 ; C30.1@4.888,19.94 cw(c4.796,19.65) 5.1,19.65 ; C30.1@5.1,20.8 5.1,19.65 ; C30.1@5.312,19.94 ccw(c5.404,19.65) 5.1,19.65 ; 8.79,27.97 8.79,26.49 9.17,26.11 10.24,26.11 10.9,26.77 C23.1@10.9,26.9 ; 10.552,26.422 ccw(c10.074,26.9) C23.1@10.75,26.9 ; C23.1@11.05,26.9 ccw(c12.064,26.9) v1@11.347,26.183 ; 11.472,27.472 ccw(c9.763,29.181) D2.A@12.18,29.181 ; v1(11.53,26) 10.9,26.63 C23.1@10.9,26.9 ; 12.32,28.32 cw(c12.83,27.81) D2.A@12.83,28.531 ; 12.326,28.326 ccw(c11.47,29.181) D2.A@12.68,29.181 ; D2.A@13.598,30.266 ccw(c13.901,30.919) 14.41,30.41 ; D2.A@13.975,29.676 cw(c14.697,29.676) 14.186,30.186 ; v1(15.94,30.94) 15,31.88 C22.1@15,31.9 ; 17.763,34.683 ccw(c16.346,36.1) C21.1@18.35,36.1 ; C10.1@18.1,17.15 cw(c18.1,16.402) 18.629,16.931 ; C10.1@18.26,17.3 19.77,15.79 v1(20.43,15.79) ; C21.1@18.5,36.25 ccw(c18.5,36.733) 18.841,36.391 ; 18.617,35.537 ccw(c18.053,36.1) C21.1@18.85,36.1 ; 18.887,35.713 ccw(c19.28,36.105) v1@19.28,35.55 ; v1@19.173,35.343 v1(19.28,35.45) 19.15,35.45 C21.1@18.5,36.1 ; v1@24.11,9.32 C13.1@26.1,7.33 ; v1@24.21,9.55 ccw(c25.007,9.55) 24.443,8.987 ; 25.232,37.556 26.38,36.409 v1(26.38,36.4) ; 25.638,35.69 cw(c25.638,34.338) C20.1@26.594,35.294 ; 25.783,7.647 ccw(c26.5,8.364) C13.1@26.5,7.35 ; C20.1@26.7,35.25 cw(c26.7,34.405) 27.297,35.003 ; C20.1@26.796,35.515 cw(c27.529,36.4) v1(26.38,36.4) ; C19.1@28.05,33.94 28.84,34.73 v1(28.91,34.73) v1@28.91,34.87 ; C19.1@28.2,34.1 26.9,35.4 C20.1@26.7,35.4 ; IC5.6@28.56,22.85 29.59,23.88 ; IC5.6@28.566,22.856 cw(c30,21.422) C35.1@30,23.45 ; v1@28.59,25.73 29.6,25.73 30.12,25.21 C35.1@30.12,23.88 ; 28.62,34.51 cw(c28.91,34.22) v1@28.91,34.63 ; v2@29.13,25.68 cw(c29.13,24.425) 30.018,25.312 ; v2@29.143,25.682 cw(c29.327,24.987) 29.835,25.495 ; 29.42,23.71 cw(c30,23.129) C35.1@30,23.95 ; C35.1@29.894,23.706 ccw(c29.348,24.252) 30.12,24.252 ; v2(32.47,29.01) v1@32.96,29.5 ; 32.726,29.266 cw(c33.05,28.941) v1@33.05,29.4 ; v1(33.05,29.5) C17.1@35.2,27.35 ; v1@33.176,29.374 ccw(c33.5,29.699) v2@33.5,29.24 ; v2@33.55,29.19 ccw(c34.009,29.19) 33.684,28.866 ; 34.767,27.783 cw(c34.084,27.1) C17.1@35.05,27.1 ; C17.1@35.2,26.95 cw(c35.2,26.25) 35.695,26.745 ; C17.1@35.2,27.25 ccw(c35.2,27.81) 35.596,27.414 ; v1(35.972,27.79) 35.282,27.1 C17.1@35.2,27.1 35.34,27.1 36.81,25.63 v2(37.14,25.63) 41.9,30.39 41.99,30.39 ; v1@36.05,34.939 v1(36.05,34.95) C18.1@36.7,35.6 ; 36.21,36.09 ccw(c36.576,36.456) C18.1@36.672,35.947 ; 36.303,35.203 ccw(c35.705,35.8) C18.1@36.55,35.8 ; 36.491,25.949 ccw(c37.14,26.597) v2@37.14,25.68 ; C18.1@36.7,35.8 C18.1@36.7,35.6 ; C18.1@36.85,35.8 ccw(c37.502,35.8) 37.041,35.339 ; v1(43.4,25.75) 43.4,25.81 44.19,26.6 C16.1@44.2,26.6 44.2,26.45 48.35,22.3 v1(48.46,22.3) ; 43.705,26.955 ccw(c44.2,27.45) C16.1@44.2,26.75 ; C16.1@44.29,26.37 43.53,27.13 43.53,28.85 36.78,35.6 C18.1@36.7,35.6 ; C16.1@44.35,26.6 ccw(c45.075,26.6) 44.562,26.088 ; 48.102,22.548 ccw(c48.46,22.907) v1@48.46,22.4 ; C23.1@10.9,26.9 14.41,30.41 ; 14.41,30.41 14.41,31.31 C22.1@15,31.9 ; C22.1@15,31.9 15,31.92 18.5,35.42 C21.1@18.5,36.1 ; C21.1@18.5,36.1 18.55,36.1 19.2,36.75 24.4,36.75 ; 24.4,36.75 25.46,35.69 26.41,35.69 C20.1@26.7,35.4 ; 24.4,36.75 24.4,36.87 26.26,38.73 31.13,38.73 33.67,36.19 36.11,36.19 C18.1@36.7,35.6 ; v1(26.38,36.4) 26.38,35.72 C20.1@26.7,35.4
  底层 w1: IC2.4@1.204,15.975 ccw(c-1.466,18.644) 2.31,18.644 ; IC2.4@1.88,14.7 IC2.2@8,14.7 ; IC2.4@1.916,14.361 cw(c2.734,13.543) 2.734,14.7 ; IC2.4@1.916,15.073 ccw(c2.816,15.973) 2.816,14.7 ; IC2.4@2.31,15.69 2.31,18.7 3.47,19.86 ; C31.2@2.4,19.2 ccw(c2.4,20.19) 3.1,19.49 ; 3.881,19.86 cw(c3.881,18.431) v2@4.891,19.441 ; 4.44,19.54 v1(5.23,18.75) ; v2@4.56,19.239 ccw(c5.23,19.454) v1(5.23,18.75) ; v2@4.609,19.159 ccw(c5.595,20.145) 5.595,18.75 ; C30.1@4.668,20.743 cw(c3.47,21.114) 3.47,19.86 ; C30.1@5.05,19.86 3.47,19.86 ; v1@5.22,18.76 ccw(c5.92,19.46) v2@5.92,18.47 ; v2@5.84,18.75 v1(5.23,18.75)
  other v2: 21.44,15.77 5.92,18.67 4.75,19.3
VDDA: C1.2 IC1.38 IC1.39 L1.1 | length 23.9
  顶层 w0.16: IC1.38@41.496,18.464 IC1.39@41.849,18.818 ; 41.679,18.641 41.679,18.648 ; IC1.38@41.761,18.244 ccw(c41.761,18.542) 41.972,18.332 ; IC1.38@41.86,18.22 42.15,18.51 IC1.39@42.15,18.52 ; 41.982,18.342 ccw(c41.771,18.553) IC1.39@42.069,18.553 ; v1@42.34,17.98 v1(42.46,17.98) v1@42.59,17.98 ; 43.24,17.33 43.3,17.33 ; C1.2@46,16.5 C1.2@46.14,16.64 ; L1.1@48.55,17.45 L1.1@48.64,17.36
  顶层 w0.3: 41.679,18.641 v1@42.34,17.98 ; IC1.38@41.761,18.224 cw(c41.761,17.416) v1@42.332,17.988 ; IC1.39@41.818,18.687 ccw(c42.002,18.603) 41.86,18.46 ; 41.914,18.406 ccw(c42.46,18.953) v1@42.46,18.18 ; IC1.39@42.092,18.563 ccw(c42.425,18.412) v1@42.166,18.154 ; v1@42.46,17.78 cw(c42.46,16.983) v2@43.023,17.547 ; v1@42.59,17.98 43.24,17.33 ; v1@42.676,17.894 ccw(c43,18.219) v2@43,17.76 ; v2@43.148,17.583 ccw(c43.405,17.535) 43.22,17.35 ; v1(46.14,17.45) L1.1@48.55,17.45 ; v1@46.281,17.309 cw(c46.623,16.967) 46.623,17.45 cw(c46.623,17.933) v1@46.281,17.591 ; v1@46.38,17.45 ccw(c46.38,17.88) v2@46.684,17.576 ; v1@46.476,17.45 cw(c46.476,17.156) v2@46.684,17.364 ; v2@46.896,17.364 cw(c47.104,17.156) 47.104,17.45 ; v2@46.896,17.576 ccw(c47.2,17.88) 47.2,17.45 ; v2@46.908,17.45 ccw(c46.908,18.792) L1.1@47.857,17.843 ; 47.15,17.45 cw(c47.15,16.45) L1.1@47.857,17.157
  顶层 w0.5: C1.2@46.014,16.486 ccw(c45.71,16.79) 46.14,16.79 ; C1.2@46.14,16.64 v1(46.14,17.45)
  底层 w0.16: v1@42.58,17.98 v1(42.46,17.98) v1@42.66,17.98 ; v1(46.14,17.45) 45.93,17.24 v1@46.31,17.24 ; v1@46.331,17.259 cw(c46.84,16.75) v2@46.84,17.47 ; v1@46.331,17.641 ccw(c46.744,18.054) v2@46.744,17.47 ; v1@46.383,17.568 ccw(c46.54,17.645) v2@46.54,17.47 ; v1@46.397,17.366 cw(c46.54,17.319) v2@46.54,17.47 ; v2@46.99,17.47 v2@46.54,17.47
  底层 w0.3: v1@42.46,17.78 cw(c42.46,16.814) v2@43.143,17.497 ; v1@42.66,17.98 43.4,17.24 v1@45.93,17.24 ; v1@42.723,17.917 cw(c42.415,17.61) v2@42.85,17.61 ; 42.795,17.845 ccw(c43,18.05) v2@43,17.76 ; v2@43,17.46 cw(c43,17.025) 43.307,17.333 ; v2@43.15,17.61 ccw(c43.44,17.61) 43.235,17.405 ; 45.15,17.24 ccw(c45.15,18.44) v1@45.999,17.591 ; v1@46.31,17.24 v2@46.54,17.47
  other v2: 46.79,17.47 43,17.61
pads on no net: IC1.0 USB1.7 USB1.8 USB1.9 USB1.MH1 USB1.MH2 Y1.3 Y1.4

## Polygon pours and split planes (outlines as drawn)
GND on 顶层 "顶层-GND" (hatched 45Degree grid 0.5 track 0.5, remove dead copper, pour order 2): 0.18,43.61 0.18,0.33 49.6,0.33 49.6,43.47 0.04,43.47
GND on MidLayer1 "MidLayer1-GND" (hatched 45Degree grid 0.5 track 0.5, remove dead copper, pour order 4): 0.39,43.68 0.39,0.47 49.53,0.47 49.53,43.68
VDD33 on MidLayer2 "MidLayer2-VDD33" (hatched 45Degree grid 0.5 track 0.5, remove dead copper, pour order 6): -0.17,43.97 -0.17,-0.16 49.88,-0.16 49.88,43.89 -0.31,43.89
GND on 底层 "底层-GND" (hatched 45Degree grid 0.5 track 0.5, remove dead copper, pour order 8): 0.46,43.68 0.46,0.61 49.67,0.61 49.67,43.54 0.74,43.54

## Keep-outs
KeepOut层:
  lines w0.2: 0,0 0,44 50,44 50,0 0,0

## Silkscreen, mask and mechanical layers (free items; w line width, h text height)
顶层丝印:
  lines w0.4: 26.293,6.09 27.707,6.09
  text "AP2-CORE-1.0" at 11.35,36.46 h0.8
  text "VCC" at 8.45,31.35 h1
  text "SWIO" at 8.08,29 h1
  text "RX" at 3.11,28.63 h1
  text "SWCLK" at 7.87,26.5 h1
  text "TX" at 3.14,26.1 h1
  text "GND" at 3.09,25.72 h1 r270
  text "GND" at 8.18,23.91 h1
  text "+" at 6.72,21.12 h1
  text "GND" at 47.13,8.28 h1
  text "5V" at 0.15,8.22 h1
  text "ISP" at 12.69,5.9 h1
  text "RUN" at 20.68,5.9 h1
  text "GND" at 0.23,5.58 h0.8
底层丝印:
  rectangle: 2.869,11.34 6.93,18.256
  text "www.yuewusheng.com" at 36.26,37.5 h0.8
  text "H" at 26.18,5.32 h1
  text "L" at 26.25,3.98 h1
机械层1:
  lines w0.254: -3.008,1.524 -2.5,0 ; -3.008,42.476 -2.5,44 ; -2.754,0 -2.246,0 ; -2.754,44 -2.246,44 ; -2.5,18.801 -2.5,0 ; -2.5,25.199 -2.5,44 ; -1.992,1.524 -2.5,0 ; -1.992,42.476 -2.5,44 ; 0,46.746 0,47.254 ; 1.524,46.492 0,47 ; 1.524,47.508 0,47 ; 19.896,47 0,47 ; 30.104,47 50,47 ; 48.476,46.492 50,47 ; 48.476,47.508 50,47 ; 50,46.746 50,47.254
  text "50 (mm)" at 20.15,46.086 h1.52
  text "44mm" at -1.586,19.055 h1.52 r90